# EAGLE board CT_schematic (EAGLE 7.6.0)

Size 130 x 64 mm. Coordinates in mm from the lower left corner, seen from the top.
Outline: 12,0 117,0 130,13 130,52 118,64 12,64 0,52 0,45 0,14 0,12 12,0
Copper layers (1*16): Top 0.035mm / dielectric 1.5mm / Bottom 0.035mm
Design rules "default": minimum track width 10mil, minimum drill 24mil, track to track 8mil, track to pad 8mil, pad to pad 8mil, via to via 8mil, smd to smd 8mil, copper to edge 40mil, drill to drill 8mil, minimum pad ring 10mil, minimum via ring 8mil, stop-mask expansion 4mil, vias tented up to drill 0mil, thermal gap 10mil

## Footprints (pad centres in the part's own frame; a part is rotated, then mirrored left to right if it is on the bottom)
C0603 = smd 0.8 x 0.8: 1 -0.762,0; 2 0.762,0
C0402 = smd 0.5 x 0.5: 1 -0.508,0; 2 0.508,0
C0805 = smd 1.2 x 1.3: 1 -1.016,0; 2 1.016,0
C1210 = smd 1.2 x 2.5: 1 -1.524,0; 2 1.524,0
C1206 = smd 1.3 x 1.6: 1 -1.524,0; 2 1.524,0
2220 = smd 1.85 x 5.5: 1 -2.55,0; 2 2.55,0
EXV-9H = smd 3.505 x 1.676: 1 -2.857,0; 2 2.857,0
L0603 = smd 0.8 x 0.8: 1 -0.762,0; 2 0.762,0
R0603 = smd 0.8 x 0.8: 1 -0.762,0; 2 0.762,0
DR1040 = smd 1.6 x 3.2: 1 -4.458,0; 2 4.458,0
PJ-037B_PACKAGE = drill 3.7 square: 1 12,0 | drill 3.2 square: 2 6,0
LQFP144 = smd 0.35 x 1.35: 1 -8.75,-10.625; 2 -8.25,-10.625; 3 -7.75,-10.625; 4 -7.25,-10.625; 5 -6.75,-10.625; 6 -6.25,-10.625; 7 -5.75,-10.625; 8 -5.25,-10.625; 9 -4.75,-10.625; 10 -4.25,-10.625; 11 -3.75,-10.625; 12 -3.25,-10.625; 13 -2.75,-10.62; 14 -2.25,-10.625; 15 -1.75,-10.625; 16 -1.25,-10.625; 17 -0.75,-10.625; 18 -0.25,-10.625; 19 0.25,-10.625; 20 0.75,-10.625; 21 1.25,-10.625; 22 1.75,-10.625; 23 2.25,-10.625; 24 2.75,-10.62; 25 3.25,-10.625; 26 3.75,-10.625; 27 4.25,-10.625; 28 4.75,-10.625; 29 5.25,-10.625; 30 5.75,-10.625; 31 6.25,-10.625; 32 6.75,-10.625; 33 7.25,-10.625; 34 7.75,-10.625; 35 8.25,-10.625; 36 8.75,-10.625; 73 8.75,10.625; 74 8.25,10.625; 75 7.75,10.625; 76 7.25,10.625; 77 6.75,10.625; 78 6.25,10.625; 79 5.75,10.625; 80 5.25,10.625; 81 4.75,10.625; 82 4.25,10.625; 83 3.75,10.625; 84 3.25,10.625; 85 2.75,10.625; 86 2.25,10.625; 87 1.75,10.625; 88 1.25,10.625; 89 0.75,10.625; 90 0.25,10.625; 91 -0.25,10.625; 92 -0.75,10.625; 93 -1.25,10.625; 94 -1.75,10.625; 95 -2.25,10.625; 96 -2.75,10.625; 97 -3.25,10.625; 98 -3.75,10.625; 99 -4.25,10.625; 100 -4.75,10.625; 101 -5.25,10.625; 102 -5.75,10.625; 103 -6.25,10.625; 104 -6.75,10.625; 105 -7.25,10.625; 106 -7.75,10.625; 107 -8.25,10.625; 108 -8.75,10.625 | smd 1.35 x 0.35: 37 10.625,-8.75; 38 10.625,-8.25; 39 10.625,-7.75; 40 10.625,-7.25; 41 10.625,-6.75; 42 10.625,-6.25; 43 10.625,-5.75; 44 10.625,-5.25; 45 10.625,-4.75; 46 10.625,-4.25; 47 10.625,-3.75; 48 10.625,-3.25; 49 10.625,-2.75; 50 10.625,-2.25; 51 10.625,-1.75; 52 10.625,-1.25; 53 10.625,-0.75; 54 10.625,-0.25; 55 10.625,0.25; 56 10.625,0.75; 57 10.625,1.25; 58 10.625,1.75; 59 10.625,2.25; 60 10.625,2.75; 61 10.625,3.25; 62 10.625,3.75; 63 10.625,4.25; 64 10.625,4.75; 65 10.625,5.25; 66 10.625,5.75; 67 10.625,6.25; 68 10.625,6.75; 69 10.625,7.25; 70 10.625,7.75; 71 10.625,8.25; 72 10.625,8.75; 109 -10.625,8.75; 110 -10.625,8.25; 111 -10.625,7.75; 112 -10.625,7.25; 113 -10.625,6.75; 114 -10.625,6.25; 115 -10.625,5.75; 116 -10.625,5.25; 117 -10.625,4.75; 118 -10.625,4.25; 119 -10.625,3.75; 120 -10.625,3.25; 121 -10.625,2.75; 122 -10.625,2.25; 123 -10.625,1.75; 124 -10.625,1.25; 125 -10.625,0.75; 126 -10.625,0.25; 127 -10.625,-0.25; 128 -10.625,-0.75; 129 -10.625,-1.25; 130 -10.625,-1.75; 131 -10.625,-2.25; 132 -10.625,-2.75; 133 -10.625,-3.25; 134 -10.625,-3.75; 135 -10.625,-4.25; 136 -10.625,-4.75; 137 -10.625,-5.25; 138 -10.625,-5.75; 139 -10.625,-6.25; 140 -10.625,-6.75; 141 -10.625,-7.25; 142 -10.625,-7.75; 143 -10.625,-8.25; 144 -10.625,-8.75
SOT-23-6 = smd 1.1 x 0.6: 1 -1.4,0.95; 2 -1.4,0; 3 -1.4,-0.95; 4 1.4,-0.95; 5 1.4,0; 6 1.4,0.95
DUMMY_PACKAGE_286 = drill 0.3: 1 0,-1; 2 1.5,-1; 3 3,-1; 4 4.5,-1; 5 6,-1; 6 7.5,-1; 7 9,-1; 8 10.5,-1; 9 12,-1; 10 13.5,-1; 11 15,-1; 12 16.5,-1; 13 18,-1; 14 19.5,-1; 15 21,-1; 16 22.5,-1
DUMMY_PACKAGE_290 = drill 0.3: 1 0,-1; 2 1.5,-1; 3 3,-1; 4 4.5,-1; 5 6,-1
DUMMY_PACKAGE_292 = drill 0.3: 1 0,-1; 2 1.5,-1; 3 3,-1; 4 4.5,-1; 5 6,-1; 6 7.5,-1; 7 9,-1
TST-110-05-T-D-RA = drill 1 pad 1.7 square: 1 0,0 | drill 1 pad 1.7: 2 0,2.54; 3 2.54,0; 4 2.54,2.54; 5 5.08,0; 6 5.08,2.54; 7 7.62,0; 8 7.62,2.54; 9 10.16,0; 10 10.16,2.54; 11 12.7,0; 12 12.7,2.54; 13 15.24,0; 14 15.24,2.54; 15 17.78,0; 16 17.78,2.54; 17 20.32,0; 18 20.32,2.54; 19 22.86,0; 20 22.86,2.54
QFN-32 = smd 0.6 x 0.3: 1 -2.3,1.75; 2 -2.3,1.25; 3 -2.3,0.75; 4 -2.3,0.25; 5 -2.3,-0.25; 6 -2.3,-0.75; 7 -2.3,-1.25; 8 -2.3,-1.75; 17 2.3,-1.75; 18 2.3,-1.25; 19 2.3,-0.75; 20 2.3,-0.25; 21 2.3,0.25; 22 2.3,0.75; 23 2.3,1.25; 24 2.3,1.75 | smd 0.3 x 0.6: 9 -1.75,-2.3; 10 -1.25,-2.3; 11 -0.75,-2.3; 12 -0.25,-2.3; 13 0.25,-2.3; 14 0.75,-2.3; 15 1.25,-2.3; 16 1.75,-2.3; 25 1.75,2.3; 26 1.25,2.3; 27 0.75,2.3; 28 0.25,2.3; 29 -0.25,2.3; 30 -0.75,2.3; 31 -1.25,2.3; 32 -1.75,2.3 | smd 3.2 x 3.2: EXP 0,0
7498011122R = smd 0.71 x 2.29: 1 -3.545,-3.18; 2 -2.525,-3.18; 3 -1.505,-3.18; 4 -0.485,-3.18; 5 0.535,-3.18; 6 1.555,-3.18; 8 3.595,-3.18; 9 5.635,-3.18; 10 6.655,-3.18; 11 -6.605,-3.18; 12 -5.585,-3.18 | smd 1.4 x 2.54: 13 -8.51,10.2; 14 8.51,10.2 | hole 1.4: -3.5,0; 3.5,0
MOLEX_47219-2001 = smd 0.8 x 1.5: 1 3.2,-2.1; 2 2.1,-2.1; 3 1,-2.1; 4 -0.1,-2.1; 5 -1.2,-2.1; 6 -2.3,-2.1; 7 -3.4,-2.1; 8 -4.5,-2.1 | smd 1.5 x 2.05: G1 6.875,-4.7; G2 6.875,3.6; G3 -6.875,3.6; G4 -6.875,-4.7
MICRO_USB_AB = smd 0.4 x 1.35: 1 1.3,0.26; 2 0.65,0.26; 3 0,0.26; 4 -0.65,0.26; 5 -1.3,0.26 | drill 0.6 pad 0.95 long: 6 4.175,-2.54; 7 -4.175,-2.54 | drill 0.7 pad 1.1 long: 8 -2.225,0.46; 9 2.225,0.46
SOT143B = smd 1 x 0.7: 1 -0.75,-1 | smd 0.6 x 0.7: 2 0.95,-1; 3 0.95,1; 4 -0.95,1
ABS07-32.768KHZ-7-T = smd 1.1 x 2.4: 1 -2.5,0; 2 0,0
ASFL1 = smd 1.7 x 1.5: 1 -1.27,-1.1; 2 1.27,-1.1; 3 1.27,1.1; 4 -1.27,1.1
IDT74FCT38072 = smd 0.51 x 1: 1 0,0; 2 1.27,0; 3 2.54,0; 4 3.81,0; 5 3.81,4.95; 6 2.54,4.95; 7 1.27,4.95; 8 0,4.95
WSON-8 = smd 0.3 x 0.6: 1 -0.75,0; 2 0.05,0; 3 0.85,0; 4 1.65,0; 5 1.65,3.8; 6 0.85,3.8; 7 0.05,3.8; 8 -0.75,3.8 | smd 3 x 2.6: PAD 0.45,1.9
HTSSOP14 = smd 1.676 x 0.356: 1 -2.8,1.95; 2 -2.8,1.3; 3 -2.8,0.65; 4 -2.8,0; 5 -2.8,-0.65; 6 -2.8,-1.3; 7 -2.8,-1.95; 8 2.8,-1.95; 9 2.8,-1.3; 10 2.8,-0.65; 11 2.8,0; 12 2.8,0.65; 13 2.8,1.3; 14 2.8,1.95 | smd 3 x 5: 15 0,0 | drill 0.4 pad 0.45: P$1 -0.75,1.5; P$2 0.75,1.5; P$3 -0.75,0; P$4 0.8,0; P$5 -0.75,-1.5; P$6 0.9,-1.5
QFN-16_EP = smd 0.805 x 0.3: 1 -1.452,0.75; 2 -1.452,0.25; 3 -1.452,-0.25; 4 -1.452,-0.75; 9 1.452,-0.75; 10 1.452,-0.25; 11 1.452,0.25; 12 1.452,0.75 | smd 0.3 x 0.805: 5 -0.75,-1.452; 6 -0.25,-1.452; 7 0.25,-1.452; 8 0.75,-1.452; 13 0.75,1.452; 14 0.25,1.452; 15 -0.25,1.452; 16 -0.75,1.452 | smd 1.55 x 1.55: 17 0,0
SON-6 = smd 0.55 x 0.3: 1 -0.355,0.5 | smd 0.52 x 0.3: 2 -0.37,0; 3 -0.37,-0.5; 4 0.37,-0.5; 5 0.37,0; 6 0.37,0.5
SW_4-1437565-2 = smd 1.4 x 2.1: 1 -2.23,4.55; 2 -2.23,-4.55; 3 2.23,4.55; 4 2.23,-4.55
LGM67K-G1J2-24-Z = smd 0.8 x 1.4: A -2,0; C 0,0
NC7SZ125M5X = smd 1.3 x 0.7: 1 -1.3,0.95; 2 -1.3,0; 3 -1.3,-0.95; 4 1.3,-0.95; 5 1.3,0.95
DUMMY_PACKAGE_307 = drill 0.3: 1 0,-1; 2 1.5,-1; 3 3,-1; 4 4.5,-1; 5 6,-1; 6 7.5,-1; 7 9,-1; 8 10.5,-1; 9 12,-1; 10 13.5,-1; 11 15,-1; 12 16.5,-1; 13 18,-1; 14 19.5,-1; 15 21,-1; 16 22.5,-1; 17 24,-1

## Placement (x,y rotation side)
C1  1e-06  [C0603]  119.35,19.85 0 top
C2  1e-07  [C0603]  123.5,17.45 90 top
C3  1e-07  [C0603]  127.65,19.85 0 top
C4  1e-07  [C0603]  127.65,26.55 0 top
C5  1e-07  [C0603]  127.65,13.3 0 top
C6  1e-07  [C0603]  119.35,11.63 90 top
C7  1e-07  [C0603]  123.5,27.35 90 top
C8  1e-07  [C0603]  123.5,12.5 90 top
C9  1e-07  [C0603]  127.65,23.2 0 top
C10  1e-07  [C0603]  127.65,29.9 0 top
C11  1e-07  [C0603]  127.65,33.25 0 top
C12  1e-07  [C0603]  103.9,45.33 0 top
C13  1e-07  [C0603]  74.34,45.33 0 top
C14  4.7e-06  [C0603]  103.9,32.47 0 top
C15  2.2e-06  [C0603]  114.4,34.05 270 top
C16  2.2e-06  [C0603]  114.4,38.2 0 top
C17  1e-07  [C0603]  103.9,29.12 0 top
C18  1e-07  [C0603]  123.5,22.4 270 top
C19  1e-08  [C0603]  114.4,26.55 0 top
C20  1e-06  [C0603]  114.4,29.9 0 top
C21  1e-11  [C0402]  119.04,44.74 0 top
C22  1e-11  [C0402]  118.39,41.06 90 top
C23  1e-07  [C0402]  79.82,6 90 top
C24  1e-07  [C0402]  40.23,5.03 0 top
C25  2.2e-08  [C0402]  25.5,19.91 270 top
C26  1e-06  [C0603]  29.49,20.4 0 top
C27  1e-06  [C0603]  48.45,28.79 90 top
C28  4.7e-10  [C0603]  45.1,28.79 90 top
C29  1e-06  [C0603]  18.21,17.04 0 top
C30  1e-07  [C0402]  41.52,58.01 0 top
C31  1e-05  [C0805]  53.24,45.5 0 top
C32  1e-08  [C0402]  36.18,5.92 90 top
C33  1e-08  [C0402]  32.5,9.6 0 top
C34  1e-08  [C0402]  65.93,30.74 0 top
C35  1e-08  [C0402]  76.77,55.35 180 top
C36  1e-05  [C1210]  89.12,50.73 0 top
C37  1e-05  [C0805]  95.75,55.15 0 top
C38  1e-06  [C0603]  41.93,20.04 270 top
C39  3.3e-09  [C0402]  38.74,20.04 90 top
C40  1e-07  [C0402]  38.74,24.03 180 top
C41  2.2e-05  [C1210]  47.38,15.37 0 top
C42  2.2e-05  [C1210]  54.93,15.37 0 top
C43  1e-05  [C1206]  47.38,20.04 0 top
C44  1e-05  [C1206]  40.11,15.37 0 top
C45  1e-05  [C0805]  114.93,16 0 top
C46  1e-06  [C0603]  87.2,20.91 0 top
C47  1e-07  [C0402]  114.93,5.89 0 top
C48  6.8e-05  [2220]  108.32,16 270 top
C49  1e-07  [C0402]  42.5,45.08 0 top
C50  0.0001  [EXV-9H]  20.97,45.78 0 top
C51  0.0001  [EXV-9H]  20.97,55.82 0 top
C52  1e-08  [C0402]  24.98,4.66 0 top
C53  1e-08  [C0402]  30.1,4.66 0 top
C54  1e-08  [C0402]  19.07,1.31 0 top
F1  240.0  [L0603]  121.1,34.05 270 top
I1  97.0  [R0603]  44.3,24.64 180 top
I5  5.2e-06  [DR1040]  75.9,15.37 270 top
I6  7e-06  [DR1040]  97.5,16 0 top
J1  PJ-037B  [PJ-037B_PACKAGE]  0,45.78 0 top
R2  1000.0  [R0603]  19.07,4.5 0 top
R4  4700.0  [R0603]  58.38,38.72 180 top
R5  4700.0  [R0603]  119.35,26.55 0 top
R6  2200.0  [R0603]  117.95,49.99 90 top
R7  2200.0  [R0603]  113.8,49.99 180 top
R8  2200.0  [R0603]  104.84,24.06 180 top
R9  2200.0  [R0603]  47.53,38.72 90 top
R10  2200.0  [R0603]  47.53,42.87 180 top
R11  47000.0  [R0603]  114.4,44.9 0 top
R12  47000.0  [R0603]  117.75,34.05 270 top
R13  10000.0  [R0603]  119.35,29.9 0 top
R14  10000.0  [R0603]  114.4,41.55 0 top
R15  10000.0  [R0603]  119.35,23.2 0 top
R16  10000.0  [R0603]  114.4,22.4 90 top
R17  10000.0  [R0603]  44.07,5.03 270 top
R18  10000.0  [R0603]  53.17,9.98 180 top
R19  10000.0  [R0603]  48.22,6.63 180 top
R20  10000.0  [R0603]  48.22,3.28 180 top
R21  10000.0  [R0603]  48.22,9.98 180 top
R22  10000.0  [R0603]  44.07,9.98 90 top
R23  0.1  [R0603]  13.26,17.04 0 top
R24  0.1  [R0603]  28.69,29.5 270 top
R25  200.0  [R0603]  18.21,13.69 180 top
R26  200.0  [R0603]  40.95,28.79 0 top
R27  12100.0  [R0603]  44.3,32.94 180 top
R28  49.9  [R0603]  28.69,24.55 270 top
R29  49.9  [R0603]  25.34,34.45 90 top
R30  49.9  [R0603]  25.34,24.55 90 top
R31  10000.0  [R0603]  54.23,38.72 90 top
R32  49.9  [R0603]  25.34,29.5 270 top
R33  10000.0  [R0603]  51.8,28.79 90 top
R34  10000.0  [R0603]  53.4,20.49 270 top
R35  10000.0  [R0603]  49.25,24.64 180 top
R36  10000.0  [R0603]  48.45,33.74 90 top
R37  10000.0  [R0603]  56.75,20.49 270 top
R38  10000.0  [R0603]  58.38,35.37 180 top
R39  10000.0  [R0603]  44.18,38.72 90 top
R40  10000.0  [R0603]  50.88,38.72 90 top
R41  10000.0  [R0603]  51.8,33.74 270 top
R42  100000.0  [R0603]  53.24,49.07 180 top
R43  100000.0  [R0603]  58.57,45.5 180 top
R44  100000.0  [R0603]  45.36,49.07 270 top
R45  100000.0  [R0603]  45.36,54.02 270 top
R46  100000.0  [R0603]  48.71,49.07 270 top
R47  100000.0  [R0603]  58.57,42.15 180 top
R48  100000.0  [R0603]  89.12,54.93 0 top
R49  200.0  [R0603]  77.26,50.73 270 top
R50  1000.0  [R0603]  95.75,58.72 0 top
R51  71007.101651032  [R0603]  40.11,10.75 270 top
R52  22000.0  [R0603]  36.76,10.75 90 top
R53  20000.0  [R0603]  114.93,12.43 0 top
R54  150000.0  [R0603]  114.93,9.08 180 top
R55  300000.0  [R0603]  87.2,11.09 180 top
R56  10000.0  [R0603]  38.66,44.12 90 top
R57  10000.0  [R0603]  42.01,49.07 270 top
R58  9100.0  [R0603]  42.01,54.02 90 top
R59  680000.0  [R0603]  38.66,49.07 90 top
R60  120000.0  [R0603]  38.66,54.02 90 top
U1  STM32F407ZET6  [LQFP144]  89.12,35.9 0 top
U2  MAX4995AAUT+T  [SOT-23-6]  73.86,25.28 0 top
U3  MAX4995AAUT+T  [SOT-23-6]  67.95,25.28 0 top
U4  dummy_connector_j2  [DUMMY_PACKAGE_286]  108.32,24.06 90 top
U5  dummy_connector_j4  [DUMMY_PACKAGE_290]  102.43,35.9 90 top
U6  dummy_connector_j5  [DUMMY_PACKAGE_292]  96.56,51.32 0 top
U7  TST-110-05-T-D-RA  [TST-110-05-T-D-RA]  75.9,6 180 top
U8  LAN8710AI-EZK  [QFN-32]  58.38,28.79 90 top
U9  7498011122R  [7498011122R]  18.21,29.5 90 top
U10  0472192001  [MOLEX_47219-2001]  65,56 180 top
U11  47590-0001  [MICRO_USB_AB]  50.08,59.31 180 top
U12  prtr5v0u2ax  [SOT143B]  50.08,54.49 90 top
U13  47590-0001  [MICRO_USB_AB]  79.92,59.31 180 top
U14  prtr5v0u2ax  [SOT143B]  88.45,59.31 90 top
U15  ABS07-32.768KHZ-7-T  [ABS07-32.768KHZ-7-T]  65.69,35.9 270 top
U16  ASFL1-25MHZ-NCS  [ASFL1]  71.5,30.74 0 top
U17  ASFL1-50MHZ-NCS  [ASFL1]  65.69,43.56 0 top
U18  idt74fct38072  [IDT74FCT38072]  71.5,35.2 0 top
U19  LP3878SDX-ADJ/NOPB  [WSON-8]  84.04,50.73 90 top
U20  tps54325PWP  [HTSSOP14]  64.16,15.37 90 top
U21  LTC3601EUD#PBF  [QFN-16_EP]  87.2,16 90 top
U22  TPS3895ADRYR  [SON-6]  34.96,49.07 270 top
U23  4-1437565-2  [SW_4-1437565-2]  8.83,8.83 45 top
U24  Q65110A2395  [LGM67K-G1J2-24-Z]  29.34,14.44 180 top
U25  nc7sz125m5x  [NC7SZ125M5X]  24.98,8.83 180 top
U26  nc7sz125m5x  [NC7SZ125M5X]  24.98,14.44 90 top
U27  nc7sz125m5x  [NC7SZ125M5X]  19.07,8.83 0 top
U28  Dummy  [DUMMY_PACKAGE_307]  83.94,7.3 0 top

## Library data of the parts
C1-C54 F1 I1 I5 I6 J1 R2 R4-R60 U1-U28 = circuit_tree

## Nets
CLK_CRYSTAL_U1_8: C21.1 U1.8 U15.1
CLK_CRYSTAL_U1_9: C22.1 U1.9 U15.2
CLK_U1_23: U1.23 U16.3
CLK_U1_35: U1.35 U18.7
CLK_U8_5: U8.5 U18.6
CLK_U18_3: U17.3 U18.3
GND: C1.2 C2.2 C3.2 C4.2 C5.2 C6.2 C7.2 C8.2 C9.2 C10.2 C11.2 C12.2 C13.2 C14.2 C15.2 C16.2 C17.2 C18.2 C19.2 C20.2 C21.2 C22.2 C23.2 C24.2 C25.2 C26.2 C27.2 C28.2 C29.2 C30.2 C31.2 C32.2 C33.2 C34.2 C35.2 C36.2 C37.2 C38.2 C39.2 C41.2 C42.2 C43.2 C44.2 C45.2 C46.2 C48.1 C49.2 C50.2 C51.2 C52.2 C53.2 C54.2 J1.2 R2.2 R11.2 R12.2 R14.2 R16.2 R22.2 R23.2 R24.2 R25.2 R27.2 R33.2 R41.2 R50.2 R52.2 R53.2 R55.2 R58.2 R60.2 U1.16 U1.31 U1.38 U1.51 U1.61 U1.83 U1.94 U1.107 U1.120 U1.130 U2.2 U3.2 U4.1 U4.6 U4.11 U5.1 U6.1 U6.6 U7.4 U7.6 U7.8 U7.10 U7.12 U7.14 U7.16 U7.18 U7.20 U8.24 U8.25 U8.EXP U10.6 U10.G1 U10.G2 U10.G3 U10.G4 U11.5 U12.1 U13.5 U14.1 U16.2 U17.2 U18.4 U18.5 U18.8 U19.3 U19.PAD U20.5 U21.1 U21.9 U21.17 U22.2 U24.C U25.2 U25.3 U26.1 U26.3 U27.1 U27.3 U28.1 U28.6 U28.11 U28.16
NET_U1_10: R7.1 U1.10 U4.8
NET_U1_11: R6.1 U1.11 U4.7
NET_U1_12: R8.1 U1.12 U4.9
NET_U1_25: R5.1 U1.25 U27.4
NET_U1_27: R9.1 U1.27 U8.17
NET_U1_33: C17.1 C18.1 C19.1 C20.1 F1.1 U1.32 U1.33
NET_U1_36: R10.1 U1.36 U8.16
NET_U1_71: C15.1 U1.71
NET_U1_106: C16.1 U1.106
NET_U1_138: R14.1 U1.138
NET_U1_141: U24.A
NET_U1_142: U23.3
NET_U1_143: R13.1 U1.143
NET_U2_3: R11.1 U2.3
NET_U3_3: R12.1 U3.3
NET_U7_19: R22.1 U7.19
NET_U8_1: C26.1 I1.1 R28.2 R29.2 R30.2 R32.2 R35.2 U8.1 U8.27 U9.2 U9.9
NET_U8_3: R35.1 U8.3
NET_U8_7: R40.1 U8.7
NET_U8_8: R41.1 U8.8
NET_U8_9: R33.1 R34.1 U8.9
NET_U8_13: R39.1 U8.13
NET_U8_18: R31.1 U8.18
NET_U8_19: R4.1 U8.19 U26.4
NET_U8_32: R27.1 U8.32
NET_U9_1: R28.1 U8.29 U9.1
NET_U9_3: R26.2 R29.1 U8.28 U9.3
NET_U9_4: R30.1 U8.31 U9.4
NET_U9_5: C25.1 U9.2 U9.5
NET_U9_6: R32.1 U8.30 U9.6
NET_U9_8: R24.1 U9.8
NET_U9_10: R26.1 U9.10
NET_U9_11: U8.2 U9.11
NET_U9_12: R25.1 U9.12
NET_U9_13: R23.1 U9.13 U9.14
NET_U11_6: U11.6 U11.7 U11.8 U11.9
NET_U13_6: U13.6 U13.7 U13.8 U13.9
NET_U19_1: C35.1 U19.1
NET_U19_6: R49.2 R50.1 U19.6
NET_U19_8: R48.1 U19.8
NET_U20_2: R51.2 R52.1 U20.2
NET_U20_3: C38.1 U20.3
NET_U20_4: C39.1 U20.4
NET_U20_8: U20.8 U20.9
NET_U20_10: C40.1 I5.1 U20.10 U20.11
NET_U20_12: C40.2 U20.12
NET_U20_15: U20.15
NET_U21_3: C47.2 I6.1 U21.3 U21.4
NET_U21_6: C47.1 U21.6
NET_U21_7: C46.1 U21.7 U21.12
NET_U21_10: R55.1 U21.10
NET_U21_11: R53.1 R54.1 U21.11
NET_U21_14: U21.14
NET_U21_ATNET_3: C48.2 I6.2 R54.2
NET_U22_1: R57.1 R58.1 U22.1
NET_U22_3: R59.2 R60.1 U22.3
NET_U22_4: R56.1 U22.4 U25.4 U26.2 U27.2
NET_U23_1: R2.1 U23.1 U23.2
PROC_ETH_CRS_DV: R38.1 U1.43 U8.15
PROC_ETH_RXD0: R36.1 U1.44 U8.11
PROC_ETH_RXD1: R37.1 U1.45 U8.10
PROC_ETH_TX_EN: U1.70 U8.21
PROC_ETH_TXD0: U1.128 U8.22
PROC_ETH_TXD1: U1.129 U8.23
PROC_GPIO_TO_U1_USB_FAULT: R15.1 U1.2 U2.6
PROC_GPIO_TO_U1_USB_FAULT2: U1.4 U3.6
PROC_GPIO_TO_U1_VBUS_EN: R16.1 U1.1 U2.4
PROC_GPIO_TO_U1_VBUS_EN2: U1.3 U3.4
PROC_PC13_ANTI_TAMP: U1.7 U28.3
PROC_PE6: U1.5 U28.2
PROC_PF3: U1.13 U28.4
PROC_PF4: U1.14 U28.5
PROC_PF5: U1.15 U28.7
PROC_PF6: U1.18 U28.8
PROC_PF7: U1.19 U28.9
PROC_PF8: U1.20 U28.10
PROC_PF9: U1.21 U28.12
PROC_PF10: U1.22 U28.13
PROC_PH1_OSC_OUT: U1.24 U28.14
PROC_SDIO_CK: R43.1 U1.113 U10.5
PROC_SDIO_CMD: R42.1 U1.116 U10.3
PROC_SDIO_D0: R44.1 U1.98 U10.7
PROC_SDIO_D1: R45.1 U1.99 U10.8
PROC_SDIO_D2: R46.1 U1.111 U10.1
PROC_SDIO_D3: R47.1 U1.112 U10.2
PROC_SPI1_MISO: U1.42 U4.3
PROC_SPI1_MOSI: U1.135 U4.2
PROC_SPI1_NSS: U1.40 U4.5
PROC_SPI1_SCK: U1.41 U4.4
PROC_SPI2_MISO: U1.28 U5.2
PROC_SPI2_MOSI: U1.29 U5.4
PROC_SPI2_NSS: U1.140 U5.5
PROC_SPI2_SCK: U1.69 U5.3
PROC_SYS_JTCK_SWCLK: R20.1 U1.109 U7.9
PROC_SYS_JTDI: R18.1 U1.110 U7.5
PROC_SYS_JTDO_SWO: U1.133 U7.13
PROC_SYS_JTMS_SWDIO: R19.1 U1.105 U7.7
PROC_SYS_JTRST: R17.1 U1.134 U7.3
PROC_USART2_RX: U1.37 U4.10
PROC_USART2_TX: U1.119 U4.12
PROC_USART3_RX: U1.78 U6.3
PROC_USART3_TX: U1.77 U6.2
PROC_USB_OTG_FS_DM: U1.103 U11.2 U12.3
PROC_USB_OTG_FS_DP: U1.104 U11.3 U12.2
PROC_USB_OTG_FS_ID: U1.102 U11.4
PROC_USB_OTG_FS_VBUS: U1.101 U2.1 U11.1 U12.4
PROC_USB_OTG_HS_DM: U1.75 U13.2 U14.3
PROC_USB_OTG_HS_DP: U1.76 U13.3 U14.2
PROC_USB_OTG_HS_ID: U1.73 U13.4
PROC_USB_OTG_HS_VBUS: U1.74 U3.1 U13.1 U14.4
RST_OUT_U7_SRESET_B: R21.1 U7.15 U25.1
VCC_S1_14: C36.1 C43.1 C44.1 C45.1 C50.1 C51.1 J1.1 R48.2 U19.4 U20.7 U20.13 U20.14 U21.15 U21.16
VCC_TIER1_1V2: C27.1 C28.1 C37.1 R49.1 U8.6 U19.5
VCC_TIER1_3V3: C1.1 C2.1 C3.1 C4.1 C5.1 C6.1 C7.1 C8.1 C9.1 C10.1 C11.1 C12.1 C13.1 C14.1 C23.1 C24.1 C29.1 C30.1 C31.1 C32.1 C33.1 C34.1 C41.1 C42.1 C49.1 C52.1 C53.1 C54.1 F1.2 I1.2 I5.2 R4.2 R5.2 R6.2 R7.2 R8.2 R9.2 R10.2 R13.2 R15.2 R17.2 R18.2 R19.2 R20.2 R21.2 R31.2 R34.2 R36.2 R37.2 R38.2 R39.2 R40.2 R42.2 R43.2 R44.2 R45.2 R46.2 R47.2 R51.1 R56.2 R57.2 R59.1 U1.6 U1.17 U1.30 U1.39 U1.52 U1.62 U1.72 U1.84 U1.95 U1.108 U1.121 U1.131 U1.144 U7.1 U7.2 U8.12 U10.4 U16.4 U17.4 U18.1 U18.2 U20.1 U22.6 U25.5 U26.5 U27.5
VCC_TIER1_5V0: C48.2 I6.2 R54.2 U2.5 U3.5 U21.8

## Tracks (layer width: path | path; a pad name or v marks a point on that pad's centre or on a via)
CLK_CRYSTAL_U1_8  (2 unrouted)
CLK_CRYSTAL_U1_9  (2 unrouted)
CLK_U1_23  (1 unrouted)
CLK_U1_35  (1 unrouted)
CLK_U8_5  (1 unrouted)
CLK_U18_3  (1 unrouted)
GND  (132 unrouted)
NET_U1_10  (2 unrouted)
NET_U1_11  (2 unrouted)
NET_U1_12  (2 unrouted)
NET_U1_25  (2 unrouted)
NET_U1_27  (2 unrouted)
NET_U1_33  (6 unrouted)
NET_U1_36  (2 unrouted)
NET_U1_71  (1 unrouted)
NET_U1_106  (1 unrouted)
NET_U1_138  (1 unrouted)
NET_U1_143  (1 unrouted)
NET_U2_3  (1 unrouted)
NET_U3_3  (1 unrouted)
NET_U7_19  (1 unrouted)
NET_U8_1  (10 unrouted)
NET_U8_3  (1 unrouted)
NET_U8_7  (1 unrouted)
NET_U8_8  (1 unrouted)
NET_U8_9  (2 unrouted)
NET_U8_13  (1 unrouted)
NET_U8_18  (1 unrouted)
NET_U8_19  (2 unrouted)
NET_U8_32  (1 unrouted)
NET_U9_1  (2 unrouted)
NET_U9_3  (3 unrouted)
NET_U9_4  (2 unrouted)
NET_U9_5  (2 unrouted)
NET_U9_6  (2 unrouted)
NET_U9_8  (1 unrouted)
NET_U9_10  (1 unrouted)
NET_U9_11  (1 unrouted)
NET_U9_12  (1 unrouted)
NET_U9_13  (2 unrouted)
NET_U11_6  (3 unrouted)
NET_U13_6  (3 unrouted)
NET_U19_1  (1 unrouted)
NET_U19_6  (2 unrouted)
NET_U19_8  (1 unrouted)
NET_U20_2  (2 unrouted)
NET_U20_3  (1 unrouted)
NET_U20_4  (1 unrouted)
NET_U20_8  (1 unrouted)
NET_U20_10  (3 unrouted)
NET_U20_12  (1 unrouted)
NET_U21_3  (3 unrouted)
NET_U21_6  (1 unrouted)
NET_U21_7  (2 unrouted)
NET_U21_10  (1 unrouted)
NET_U21_11  (2 unrouted)
NET_U21_ATNET_3  (2 unrouted)
NET_U22_1  (2 unrouted)
NET_U22_3  (2 unrouted)
NET_U22_4  (4 unrouted)
NET_U23_1  (2 unrouted)
PROC_ETH_CRS_DV  (2 unrouted)
PROC_ETH_RXD0  (2 unrouted)
PROC_ETH_RXD1  (2 unrouted)
PROC_ETH_TX_EN  (1 unrouted)
PROC_ETH_TXD0  (1 unrouted)
PROC_ETH_TXD1  (1 unrouted)
PROC_GPIO_TO_U1_USB_FAULT  (2 unrouted)
PROC_GPIO_TO_U1_USB_FAULT2  (1 unrouted)
PROC_GPIO_TO_U1_VBUS_EN  (2 unrouted)
PROC_GPIO_TO_U1_VBUS_EN2  (1 unrouted)
PROC_PC13_ANTI_TAMP  (1 unrouted)
PROC_PE6  (1 unrouted)
PROC_PF3  (1 unrouted)
PROC_PF4  (1 unrouted)
PROC_PF5  (1 unrouted)
PROC_PF6  (1 unrouted)
PROC_PF7  (1 unrouted)
PROC_PF8  (1 unrouted)
PROC_PF9  (1 unrouted)
PROC_PF10  (1 unrouted)
PROC_PH1_OSC_OUT  (1 unrouted)
PROC_SDIO_CK  (2 unrouted)
PROC_SDIO_CMD  (2 unrouted)
PROC_SDIO_D0  (2 unrouted)
PROC_SDIO_D1  (2 unrouted)
PROC_SDIO_D2  (2 unrouted)
PROC_SDIO_D3  (2 unrouted)
PROC_SPI1_MISO  (1 unrouted)
PROC_SPI1_MOSI  (1 unrouted)
PROC_SPI1_NSS  (1 unrouted)
PROC_SPI1_SCK  (1 unrouted)
PROC_SPI2_MISO  (1 unrouted)
PROC_SPI2_MOSI  (1 unrouted)
PROC_SPI2_NSS  (1 unrouted)
PROC_SPI2_SCK  (1 unrouted)
PROC_SYS_JTCK_SWCLK  (2 unrouted)
PROC_SYS_JTDI  (2 unrouted)
PROC_SYS_JTDO_SWO  (1 unrouted)
PROC_SYS_JTMS_SWDIO  (2 unrouted)
PROC_SYS_JTRST  (2 unrouted)
PROC_USART2_RX  (1 unrouted)
PROC_USART2_TX  (1 unrouted)
PROC_USART3_RX  (1 unrouted)
PROC_USART3_TX  (1 unrouted)
PROC_USB_OTG_FS_DM  (2 unrouted)
PROC_USB_OTG_FS_DP  (2 unrouted)
PROC_USB_OTG_FS_ID  (1 unrouted)
PROC_USB_OTG_FS_VBUS  (3 unrouted)
PROC_USB_OTG_HS_DM  (2 unrouted)
PROC_USB_OTG_HS_DP  (2 unrouted)
PROC_USB_OTG_HS_ID  (1 unrouted)
PROC_USB_OTG_HS_VBUS  (3 unrouted)
RST_OUT_U7_SRESET_B  (2 unrouted)
VCC_S1_14  (13 unrouted)
VCC_TIER1_1V2  (5 unrouted)
VCC_TIER1_3V3  (87 unrouted)
VCC_TIER1_5V0  (5 unrouted)

## Text on the board
bPlace: Automated Designs created at http://circuit-tree.com